# EAGLE board untitled (EAGLE 5.08)
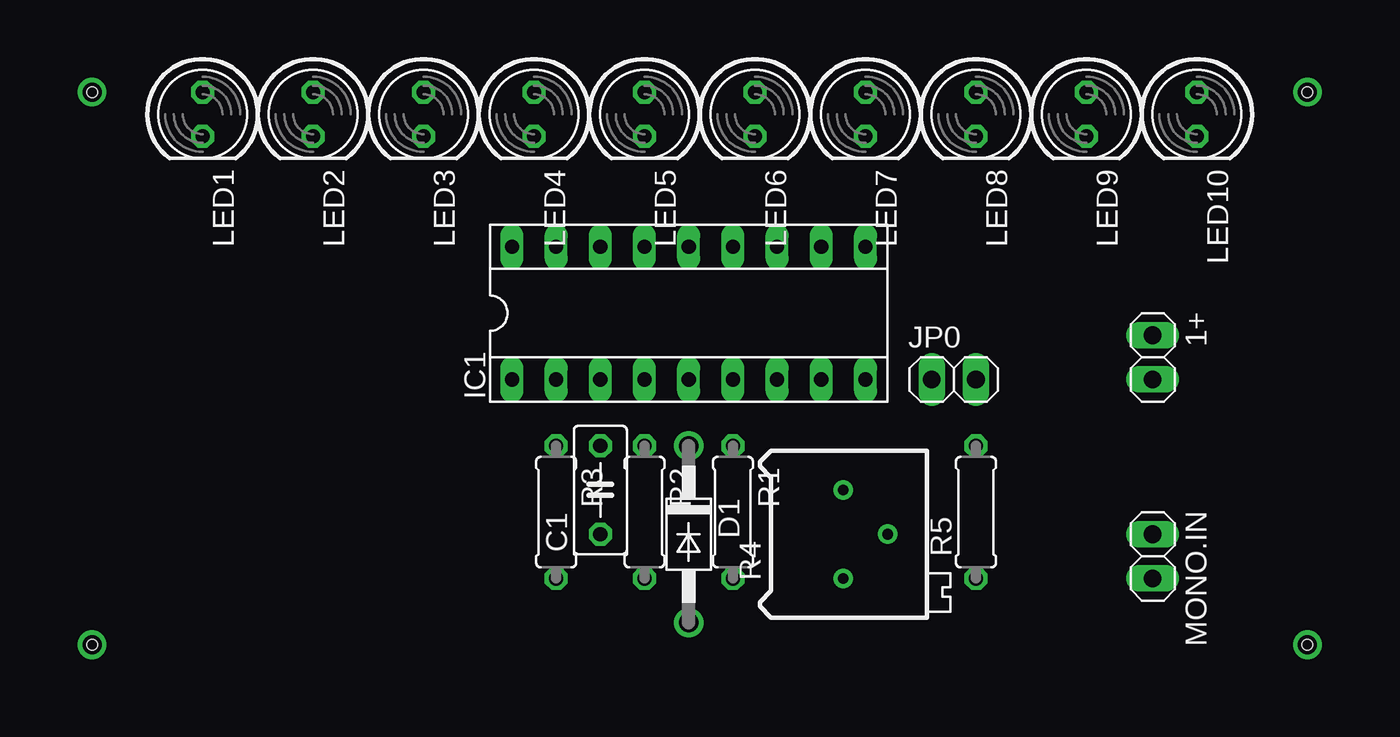
[diagram p0: board, top side]
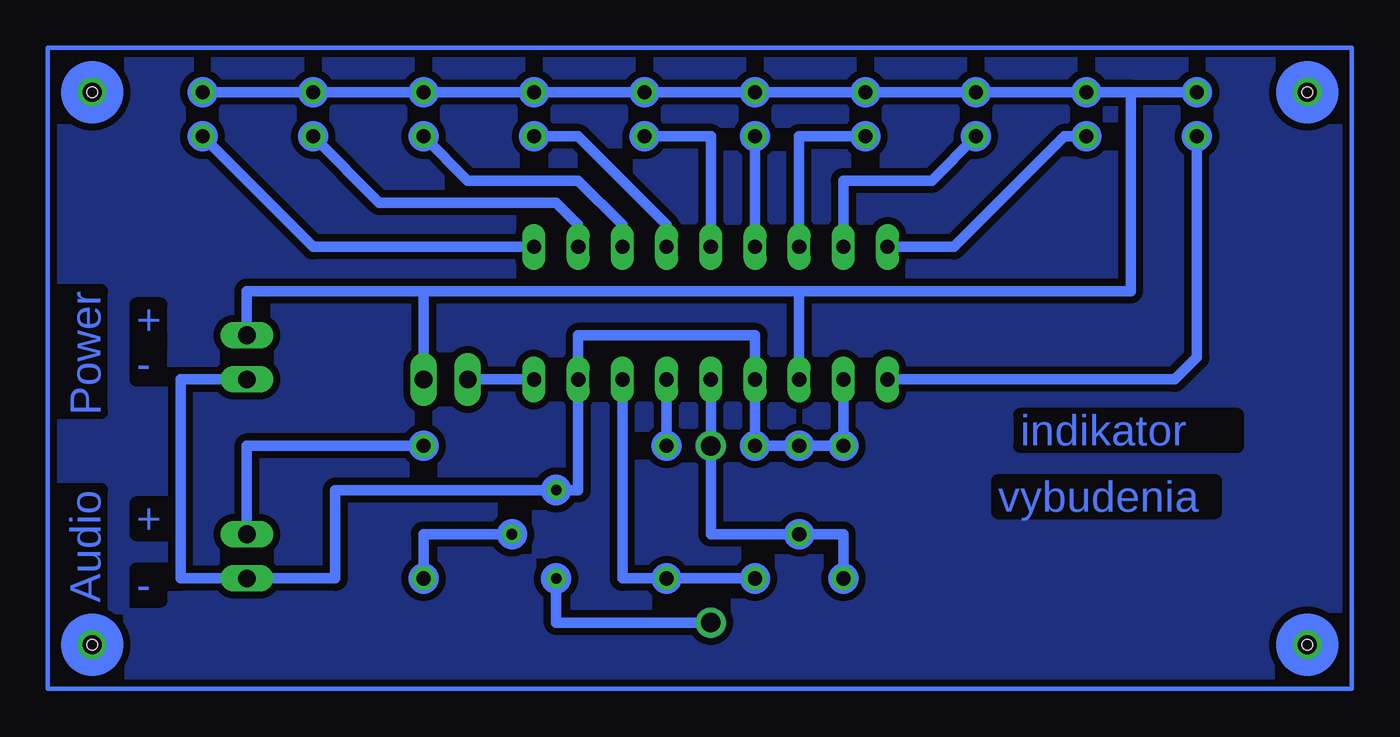
[diagram p1: board, bottom side, seen from below]

No outline drawn. Coordinates in mm, seen from the top.
Copper layers (1*16): Top 0.035mm / dielectric 1.5mm / Bottom 0.035mm
Design rules "default": minimum track width 10mil, minimum drill 24mil, track to track 8mil, track to pad 8mil, pad to pad 8mil, via to via 8mil, smd to smd 8mil, copper to edge 40mil, drill to drill 8mil, minimum pad ring 10mil, minimum via ring 8mil, stop-mask expansion 4mil, vias tented up to drill 0mil, thermal gap 10mil
Holes 0.6 mm at -2.54,45.72 67.31,45.72 67.31,13.97 -2.54,13.97

## Footprints (pad centres in the part's own frame; a part is rotated, then mirrored left to right if it is on the bottom)
1X02 = drill 1.016 long: 1 -1.27,0; 2 1.27,0
C050-030X075 = drill 0.813 octagon: 1 -2.54,0; 2 2.54,0
DO41-10 = drill 1.118 round: A 5.08,0; C -5.08,0
SOCKET-18 = drill 0.813 long: 1 -10.16,-3.81; 2 -7.62,-3.81; 3 -5.08,-3.81; 4 -2.54,-3.81; 5 0,-3.81; 6 2.54,-3.81; 7 5.08,-3.81; 8 7.62,-3.81; 9 10.16,-3.81; 10 10.16,3.81; 11 7.62,3.81; 12 5.08,3.81; 13 2.54,3.81; 14 0,3.81; 15 -2.54,3.81; 16 -5.08,3.81; 17 -7.62,3.81; 18 -10.16,3.81
LED5MM = drill 0.813 octagon: A -1.27,0; K 1.27,0
0207/7 = drill 0.813 octagon: 1 -3.81,0; 2 3.81,0
RTRIM64P = drill 0.61 round: 1 0,-2.54; 2 2.54,0; 3 0,2.54

## Placement (x,y rotation side)
1+  [1X02]  58.42,30.48 270 top
C1  100nF  [C050-030X075]  26.67,22.86 90 top
D1  1N4004  [DO41-10]  31.75,20.32 270 top
IC1  LM3915N  [SOCKET-18]  31.75,33.02 0 top
JP0  Jumper  [1X02]  46.99,29.21 0 top
LED1  [LED5MM]  3.81,44.45 270 top
LED2  [LED5MM]  10.16,44.45 270 top
LED3  [LED5MM]  16.51,44.45 270 top
LED4  [LED5MM]  22.86,44.45 270 top
LED5  [LED5MM]  29.21,44.45 270 top
LED6  [LED5MM]  35.56,44.45 270 top
LED7  [LED5MM]  41.91,44.45 270 top
LED8  [LED5MM]  48.26,44.45 270 top
LED9  [LED5MM]  54.61,44.45 270 top
LED10  [LED5MM]  60.96,44.45 270 top
MONO.IN  [1X02]  58.42,19.05 270 top
R1  10K  [0207/7]  34.29,21.59 270 top
R2  1K  [0207/7]  29.21,21.59 270 top
R3  100K  [0207/7]  24.13,21.59 270 top
R4  10K  [RTRIM64P]  40.64,20.32 0 top
R5  10K  [0207/7]  48.26,21.59 90 top

## Library data of the parts
1+ JP0 MONO.IN = pinhead
C1 R1-R5 = rcl
D1 = diode
IC1 = ic-package
LED1-LED10 = led

## Nets
N$1: MONO.IN.1 R5.2
N$2: R4.2 R5.1
N$3: D1.A R4.1
N$4: C1.1 D1.C IC1.5 R3.2
N$6: IC1.9 JP0.1
N$7: IC1.6 R1.1
N$8: IC1.7 R1.2 R2.2
N$9: 1+.2 C1.2 IC1.2 IC1.4 IC1.8 MONO.IN.2 R2.1 R3.1 R4.3
N$10: 1+.1 IC1.3 JP0.2 LED1.A LED2.A LED3.A LED4.A LED5.A LED6.A LED7.A LED8.A LED9.A LED10.A
N$11: IC1.1 LED1.K
N$12: IC1.18 LED2.K
N$13: IC1.17 LED3.K
N$14: IC1.16 LED4.K
N$15: IC1.15 LED5.K
N$16: IC1.14 LED6.K
N$17: IC1.13 LED7.K
N$18: IC1.12 LED8.K
N$19: IC1.11 LED9.K
N$20: IC1.10 LED10.K

## Tracks (layer width: path | path; a pad name or v marks a point on that pad's centre or on a via)
N$1
  Bottom 0.61: R5.2 58.42,25.4 MONO.IN.1
N$2
  Bottom 0.61: R4.2 48.26,20.32 R5.1
N$3
  Bottom 0.61: D1.A 40.64,15.24 R4.1
N$4
  Bottom 0.61: IC1.5 D1.C 31.75,20.32 C1.1 24.13,20.32 R3.2
N$5
  Bottom 0.254: -5.08,48.26 69.85,48.26 69.85,11.43 -5.08,11.43 -5.08,48.26
N$6
  Bottom 0.61: IC1.9 JP0.1
N$7
  Bottom 0.61: R1.1 IC1.6
N$8
  Bottom 0.61: R2.2 R1.2 36.83,17.78 IC1.7
N$9
  Bottom 0.61: IC1.2 R3.1 C1.2 R2.1 IC1.4 29.21,31.75 39.37,31.75 IC1.8 39.37,22.86 R4.3 53.34,22.86 53.34,17.78 MONO.IN.2 62.23,17.78 62.23,29.21 1+.2
N$10
  Bottom 0.61: 7.62,45.72 LED1.A | 7.62,45.72 LED2.A LED3.A LED4.A LED5.A LED6.A LED7.A LED8.A LED9.A LED10.A | 26.67,34.29 IC1.3 | 26.67,34.29 7.62,34.29 7.62,45.72 | 26.67,34.29 48.26,34.29 | 48.26,34.29 58.42,34.29 1+.1 | 48.26,34.29 JP0.2
N$11
  Bottom 0.61: LED1.K 3.81,30.48 5.08,29.21 IC1.1
N$12
  Bottom 0.61: IC1.18 17.78,36.83 11.43,43.18 LED2.K
N$13
  Bottom 0.61: LED3.K 19.05,40.64 24.13,40.64 IC1.17
N$14
  Bottom 0.61: LED4.K 26.67,43.18 IC1.16
N$15
  Bottom 0.61: IC1.15 LED5.K
N$16
  Bottom 0.61: LED6.K 31.75,43.18 IC1.14
N$17
  Bottom 0.61: LED7.K 39.37,43.18 34.29,38.1 IC1.13
N$18
  Bottom 0.61: LED8.K 45.72,40.64 39.37,40.64 36.83,38.1 IC1.12
N$19
  Bottom 0.61: IC1.11 39.37,38.1 40.64,39.37 50.8,39.37 LED9.K
N$20
  Bottom 0.61: LED10.K 54.61,36.83 IC1.10
N$21  (via drill 1.1)
  other vias: -2.54,45.72
N$22  (via drill 1.1)
  other vias: -2.54,13.97
N$23  (via drill 1.1)
  other vias: 67.31,45.72
N$24  (via drill 1.1)
  other vias: 67.31,13.97
N$25
  pour Bottom (isolate 0.406): -5.08,48.01 69.85,48.01 69.85,11.43 -5.08,11.43
(copper drawn outside any net)
  shapes: Bottom circle x39

## Text on the board
Bottom: Power | + | - | indikator | Audio | vybudenia | + | -